# Altium PCB PCB1.pcbdoc
Units mil, origin at the board's own origin, x right, y up, seen from the top; angles counter-clockwise.
Board outline 1670 x 1320 mil, 2 copper layers (Top Layer, Bottom Layer); 23 components, 18 nets, 76 pads, 24 vias.
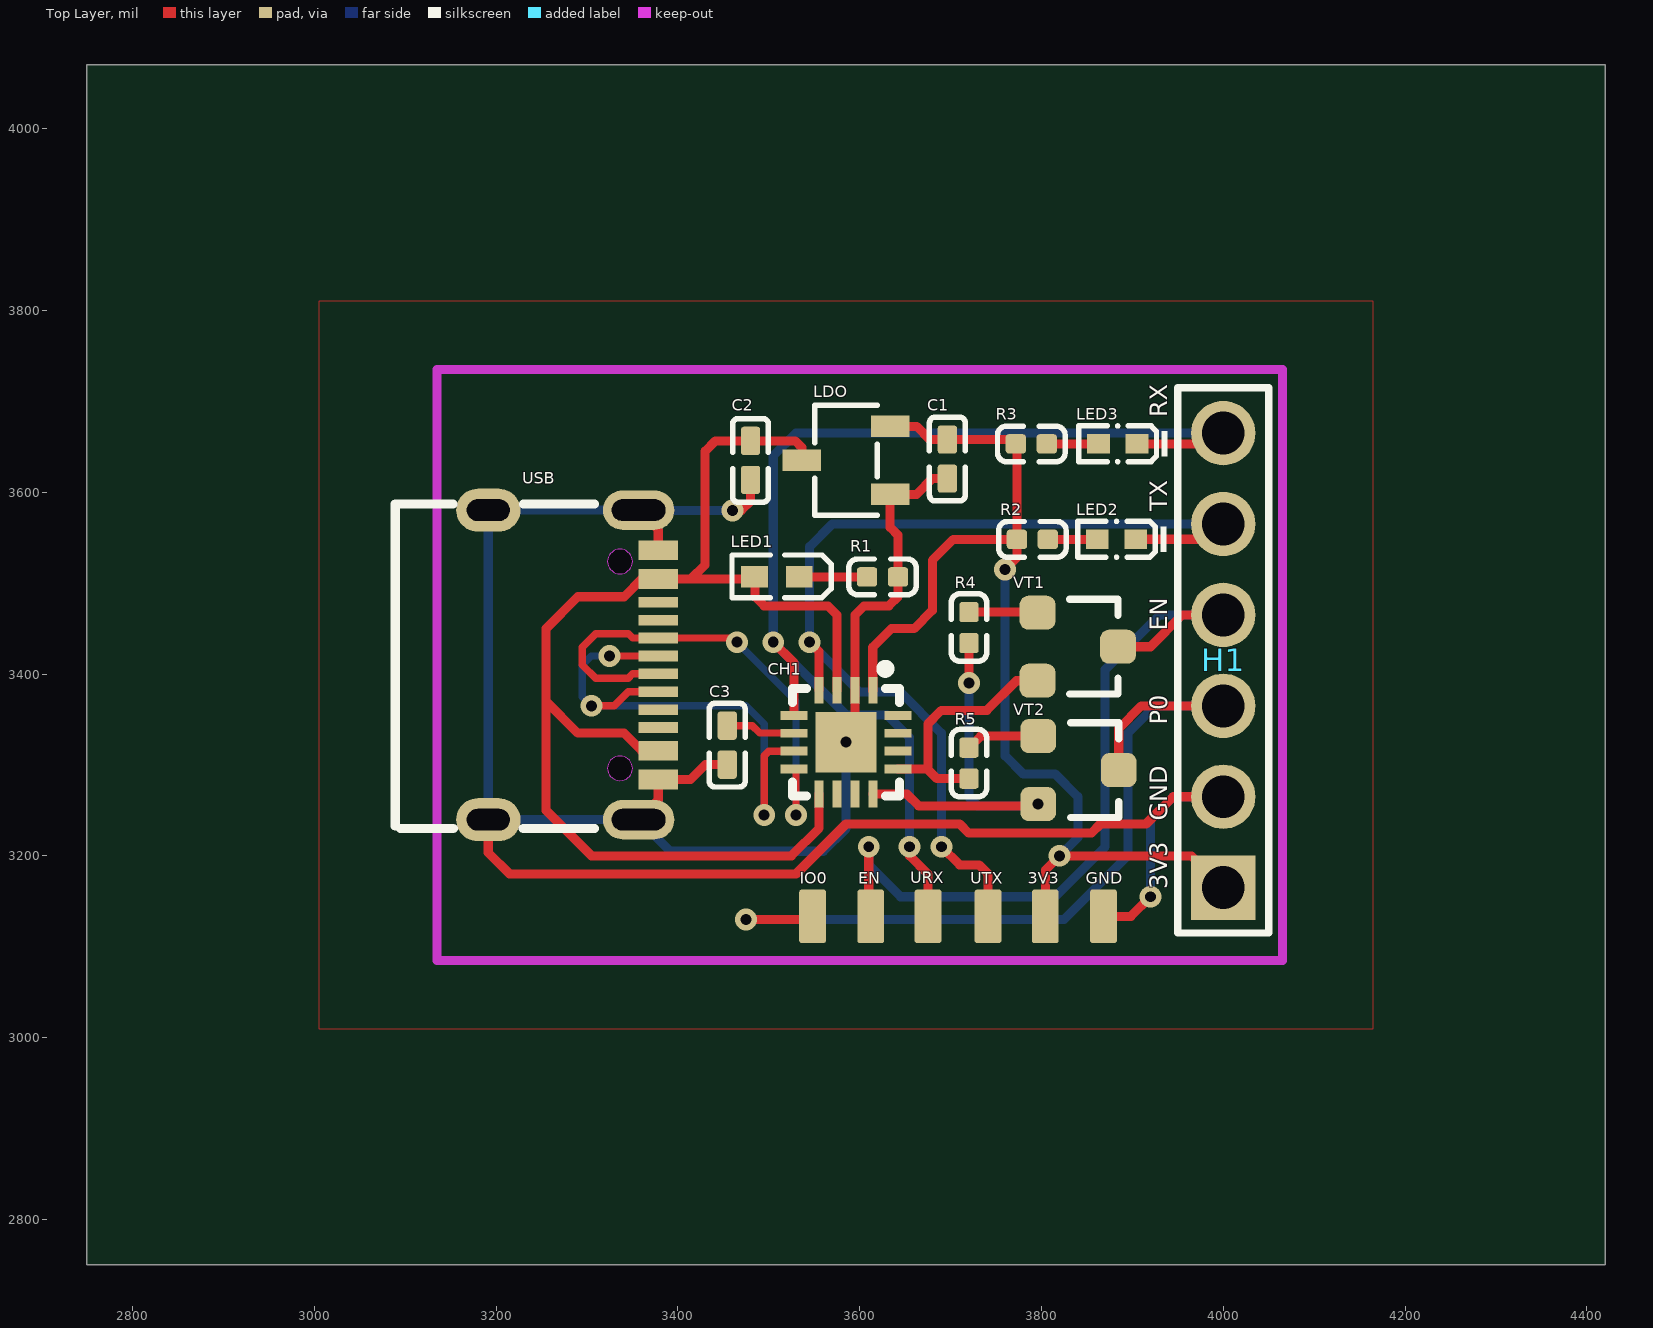
[diagram p0: Top Layer view]
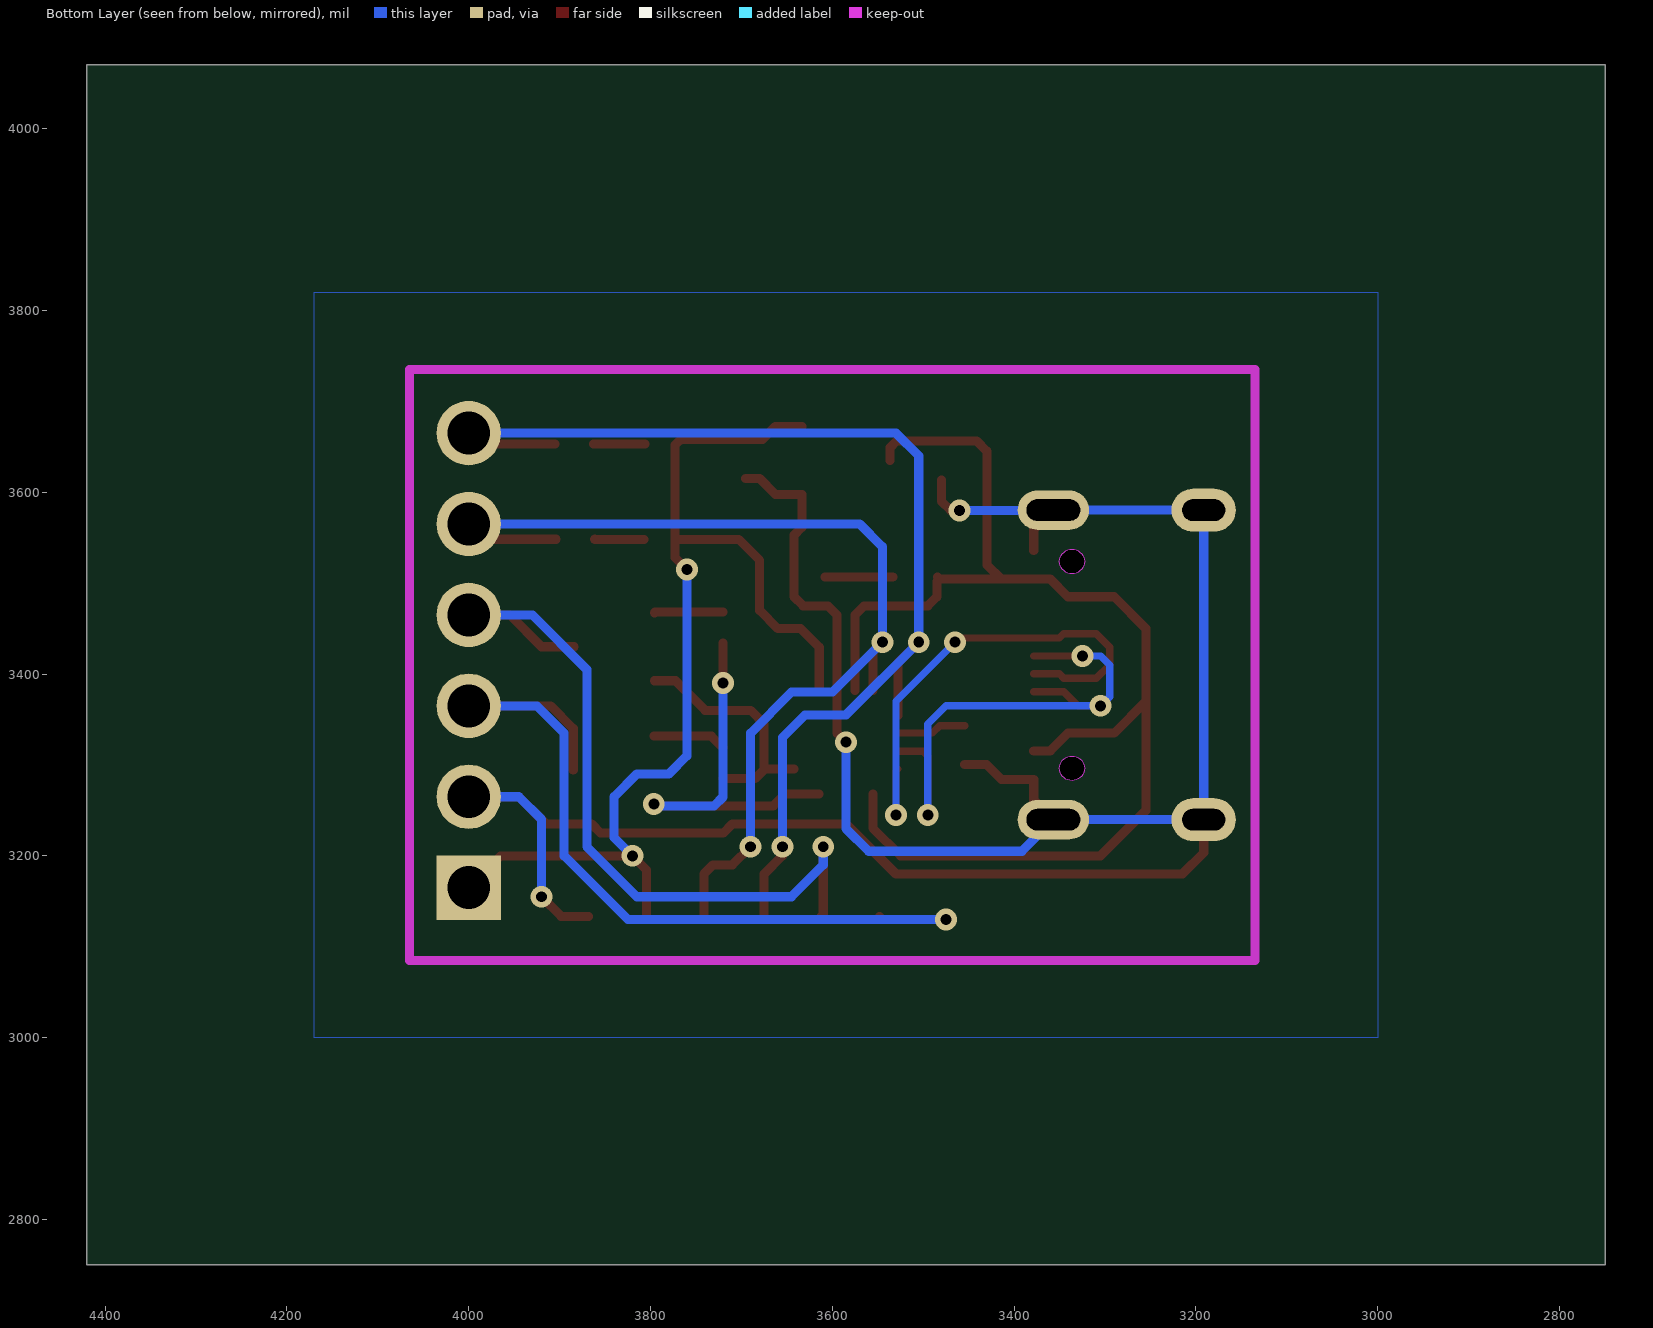
[diagram p1: Bottom Layer view, seen from below]

## Layer stack, top to bottom
Top Layer: signal copper (thickness not stored)
Dielectric: dielectric 12.6, FR-4, Dk 4.8
Bottom Layer: signal copper (thickness not stored)

## Board outline
4420,2750 2750,2750 2750,4070 4420,4070

## Components (designator, comment, footprint, x,y, rotation, side; value= is the part's Value field where it differs from the comment)
3V3 "3V3" FPCB焊脚 3804.25,3133.39 r90 top
C1 "CL05A105KP5NNNC" c0402 3696.46,3636.46 r270 top
C2 "CL05A105KP5NNNC" c0402 3480,3635 r90 top
C3 "CC0402KRX7R7BB104" c0402 3454.35,3321.73 r90 top
CH1 "CH343P" TQFN-16_L3.0-W3.0-P0.50-BL-EP1.7 3585,3325 r180 top
EN "FPCB焊脚" FPCB焊脚 3612.28,3133.39 r270 top
GND "GND" FPCB焊脚 3868.25,3133.39 r90 top
H1 "2.54-1x6P直针" HDR-TH_6P-P2.54-V-M-1 4000,3415 r90 top
IO0 "FPCB焊脚" FPCB焊脚 3548.29,3133.39 r90 top
LDO "ME6209A33M3G" SOT-23-3_L2.9-W1.6-P1.90-LS2.8-BR 3585,3635 r0 top
LED1 "XL-1005SURC" LED0402-R-RD_RED 3509.03,3506.89 r180 top
LED2 "XL-1005UGC" LED0402-RD_GREEN 3882.61,3548.24 r180 top
LED3 "XL-1005UGC" LED0402-RD_GREEN 3883.86,3653.24 r180 top
R1 "TR0402D10K0Q1025Z" R0402 3625.16,3506.89 r180 top
R2 "TR0402D10K0Q1025Z" R0402 3789.99,3548.13 r0 top
R3 "TR0402D10K0Q1025Z" R0402 3788.86,3653.13 r0 top
R4 "TR0402D10K0Q1025Z" R0402 3720.29,3451.09 r90 top
R5 "TR0402D10K0Q1025Z" R0402 3720.29,3301.92 r90 top
URX "FPCB焊脚" FPCB焊脚 3675.26,3133.39 r270 top
USB "TYPE-C 16PIN 2MD(073)" USB-C-SMD_TYPE-C-6PIN-2MD-073 3285,3410 r270 top
UTX "FPCB焊脚" FPCB焊脚 3741.27,3133.39 r90 top
VT1 "S8050" SMT_TRIODE_NPN 3840,3430 r270 top
VT2 "S8050" SMT_TRIODE_NPN 3840.71,3294.29 r270 top

## Footprints (in the part's own frame and the unit in brackets; to place one, negate y for a bottom-side part, rotate by r counter-clockwise, add the part's x,y. Pads: shape width x height; smd on the part's side, far side on the other; paste and mask are expansions set on the pad)
c0402 [mm]
  rrect30% 0.79x0.54 smd: 1(-0.545,0) 2(0.545,0)
  silkscreen extent -1.17,-0.5 1.17,0.5
FPCB焊脚 [mm]
  rrect20% 1.5x0.75 smd: 1(0,0)
HDR-TH_6P-P2.54-V-M-1 [mm]
  rect 1.8x1.8 hole 1.2: 1(-6.35,0)
  round 1.8 hole 1.2: 2(-3.81,0) 3(-1.27,0) 4(1.27,0) 5(3.81,0) 6(6.35,0)
  silkscreen extent -7.62,-1.27 7.62,1.27
LED0402-R-RD_RED [mm]
  rect 0.75x0.6 smd: 1(0.623,0) 2(-0.623,0)
  silkscreen extent -1.51,-0.61 1.26,0.58
LED0402-RD_GREEN [mm]
  rect 0.636x0.54 smd: 1(-0.538,0) 2(0.538,0)
  silkscreen extent -1.39,-0.54 1.09,0.54
R0402 [mm]
  rrect30% 0.566x0.54 smd: 1(-0.433,0) 2(0.433,0)
  silkscreen extent -0.94,-0.5 0.94,0.5
SMT_TRIODE_NPN [mm]
  rrect50% 0.95x1 smd: 1(-0.95,-1.125) 2(0.95,-1.125) 3(0,1.125)
  silkscreen extent -1.33,-0.22 1.32,1.13
SOT-23-3_L2.9-W1.6-P1.90-LS2.8-BR [mm]
  rect 1.07x0.6 smd: 1(1.235,-0.95) 2(1.235,0.95) 3(-1.235,0)
  silkscreen extent -0.88,-1.54 0.88,1.54
TQFN-16_L3.0-W3.0-P0.50-BL-EP1.7 [mm]
  rect 0.25x0.75 smd: 1(-0.748,-1.45) 2(-0.249,-1.45) 3(0.252,-1.45) 4(0.751,-1.45) 9(0.75,1.45) 10(0.25,1.45) 11(-0.25,1.45) 12(-0.749,1.45)
  rect 0.75x0.25 smd: 5(1.45,-0.75) 6(1.45,-0.25) 7(1.45,0.25) 8(1.45,0.75) 13(-1.45,0.75) 14(-1.45,0.25) 15(-1.45,-0.25) 16(-1.45,-0.75)
  rect 1.7x1.7 smd: 17(0,0)
  silkscreen extent -1.5,-2.17 1.5,1.5
USB-C-SMD_TYPE-C-6PIN-2MD-073 [mm]
  rect 0.55x1.1 smd: 1(-3.2,2.375) 2(-2.4,2.375) 11(2.4,2.375) 12(3.2,2.375)
  rect 0.3x1.1 smd: 3(-1.75,2.375) 4(-1.25,2.375) 5(-0.75,2.375) 6(-0.25,2.375) 7(0.25,2.375) 8(0.75,2.375) 9(1.25,2.375) 10(1.75,2.375)
  oval 1.1x2 hole 0.6 slot 1.5 at 90 deg: 13(-4.325,1.825) 14(4.325,1.825)
  oval 1.2x1.8 hole 0.6 slot 1.2 at 90 deg: 13(-4.325,-2.375) 14(4.325,-2.375)
  Multi-Layer board cut-out: -2.89,1.655 -3.062,1.606 -3.187,1.478 -3.233,1.305 -3.188,1.132 -3.062,1.004 -2.89,0.955 -2.89,0.955 -2.718,1.004 -2.592,1.132 -2.547,1.305 -2.592,1.478 -2.718,1.606 -2.89,1.655
  Multi-Layer board cut-out: 2.89,1.655 2.718,1.606 2.593,1.478 2.547,1.305 2.592,1.132 2.718,1.004 2.89,0.955 2.89,0.955 3.062,1.004 3.188,1.132 3.233,1.305 3.188,1.478 3.062,1.606 2.89,1.655
  Multi-Layer keep-out region: -2.89,1.655 -3.062,1.606 -3.187,1.478 -3.233,1.305 -3.188,1.132 -3.062,1.004 -2.89,0.955 -2.89,0.955 -2.718,1.004 -2.592,1.132 -2.547,1.305 -2.592,1.478 -2.718,1.606 -2.89,1.655
  Multi-Layer keep-out region: 2.89,1.655 2.718,1.606 2.593,1.478 2.547,1.305 2.592,1.132 2.718,1.004 2.89,0.955 2.89,0.955 3.062,1.004 3.188,1.132 3.233,1.305 3.188,1.478 3.062,1.606 2.89,1.655
  silkscreen extent -4.5,-4.97 4.57,0.6

## Via types
v1: diameter 24.02, hole 12.01, Top Layer to Bottom Layer, 24 vias

## Nets (pads, with @x,y where several pads share a name; then routed paths per layer and width w, separated by ;. In a path a pad name is that pad's centre, name@x,y a point inside that pad or via, vN(x,y) a via of type N, cw(c..) or ccw(c..) an arc to the next point about the centre after c; other vN are vias at no path point)
3V3: 3V3.1 C1.1 CH1.1 H1.1 LDO.2 R2.1 R3.1 | length 1221.9
  Top Layer w10: CH1.1 3614.47,3429.47 3635,3450 3660,3450 3680,3470 3680,3525 3703.13,3548.13 R2.1 ; LDO.2 3662.6,3672.4 3677.02,3657.98 3696.46,3657.98 3766.97,3657.98 R3.1 3772.95,3652.01 R2.1 ; v1(3760,3515) 3772.95,3527.95 R2.1 ; 3V3.1 3804.25,3184.25 v1(3820,3200) 3965,3200 H1.1
  Bottom Layer w10: v1(3760,3515) 3760,3310 3780,3290 3815,3290 3840,3265 3840,3220 v1(3820,3200)
$1N1465: R5.2 VT2.1 | length 81.4
  Top Layer w10: R5.2 3733.02,3331.69 VT2.1
$1N1471: R4.2 VT1.1 | length 75.7
  Top Layer w10: R4.2 3794.98,3468.13 VT1.1
$1N1804: LED1.2 R1.2 | length 74.6
  Top Layer w10: LED1.2 R1.2
$1N2102: C3.2 CH1.6 | length 77
  Top Layer w8: C3.2 3481.81,3343.19 3490,3335 3527.76,3335 CH1.6
$1N3108: LED2.2 R2.2 | length 54.4
  Top Layer w10: R2.2 3861.31,3548.13 LED2.2
$1N3156: LED3.2 R3.2 | length 56.8
  Top Layer w10: R3.2 3862.56,3653.13 LED3.2
CP_RX: CH1.5 H1.6 LED3.1 URX.1 | length 1298.6
  Top Layer w10: v1(3505,3435) 3527.91,3412.09 CH1.5 ; v1(3655,3210) 3655,3200 3675,3180 3675,3133.65 URX.1 ; LED3.1 3988.24,3653.24 H1.6
  Bottom Layer w10: v1(3655,3210) 3655,3330 3630,3355 3585,3355 v1(3505,3435) 3505,3640 3530,3665 H1.6
  other v1: 3505,3435 3505,3435
CP_TX: CH1.4 H1.5 LED2.1 UTX.1 | length 1152.5
  Top Layer w10: v1(3545,3435) 3555.41,3424.59 CH1.4 ; v1(3690,3210) 3710,3190 3731.27,3190 3741.27,3180 UTX.1 ; LED2.1 3983.24,3548.24 H1.5
  Bottom Layer w10: v1(3690,3210) 3690,3335 3645,3380 3600,3380 v1(3545,3435) 3545,3540 3570,3565 H1.5
  other v1: 3690,3210
DTR: CH1.12 R4.1 VT2.2 | length 436.1
  Top Layer w10: CH1.12 3652.09,3267.91 3665,3255 3794.53,3255 v1(3796.42,3256.89) ; v1(3720.29,3390) R4.1
  Bottom Layer w10: v1(3720.29,3390) 3720.29,3264.71 3730,3255 v1@3795,3255
EN: EN.1 H1.4 VT1.3 | length 874.9
  Top Layer w10: v1(3610,3210) 3610,3135.66 EN.1 ; VT1.3 3920,3430 3955,3465 H1.4
  Bottom Layer w10: v1(3610,3210) 3610,3190 3645,3155 3815,3155 3870,3210 3870,3405 3930,3465 H1.4
GND: C1.2 C2.1 C3.1 CH1.2 CH1.17 GND.1 H1.2 LDO.1 R1.1 USB.1 USB.12 USB.13 USB.14 | length 2877.9
  Top Layer w10: USB.14@3191.49,3239.72 3191.49,3203.51 3215,3180 3530,3180 3585,3235 3710,3235 3720,3225 3855,3225 3865,3235 3915,3235 3945,3265 v1(4000,3265) ; v1(3356.86,3239.72) 3378.51,3261.38 USB.12 3414.01,3284.01 3430.27,3300.27 C3.1 ; USB.13@3356.86,3580.28 3378.51,3558.62 USB.1 ; v1(3460,3580) 3470,3580 3480,3590 C2.1 ; v1(3585,3325) 3594.78,3334.8 CH1.2 3594.78,3464.78 3605,3475 3632.2,3475 3642.2,3485 R1.1 3642.2,3552.8 3633.62,3561.38 LDO.1 3662.6,3597.6 3680.06,3615.06 C1.2@3695.32,3615.06 ; GND.1 3898.39,3133.39 v1(3920,3155)
  Bottom Layer w10: v1(3460,3580) 3357.13,3580 3356.86,3580.28 3191.49,3580.28 3191.49,3239.72 v1(3356.86,3239.72) 3391.58,3205 3560,3205 3585,3230 v1(3585,3325) ; v1(3920,3155) 3920,3240 3945,3265 v1(4000,3265)
GPIO0: H1.3 IO0.1 VT2.3 | length 947.2
  Top Layer w10: v1(3475,3130) 3544.9,3130 IO0.1 ; VT2.3 3885,3340 3910,3365 H1.3
  Bottom Layer w10: v1(3475,3130) 3825,3130 3895,3200 3895,3335 3925,3365 H1.3
RTS: CH1.13 R5.1 VT1.2 | length 272.7
  Top Layer w10: CH1.13 3674.53,3295.47 ; R5.1 3685.12,3284.88 3674.53,3295.47 ; VT1.2 3772.6,3392.6 3740,3360 3690,3360 3675,3345 3675,3295.94 3674.53,3295.47
USB-PWR-DN: CH1.8 USB.5 USB.7 | length 559.3
  Top Layer w8: USB.7 3350.16,3400.16 3345.38,3395.38 3309.62,3395.38 3295,3410 3295,3429.53 3309.77,3444.3 3345.7,3444.3 3350.47,3439.53 USB.5 3460.47,3439.53 v1(3465,3435) ; CH1.8 3530,3293.39 v1(3530,3245)
  Bottom Layer w8: v1(3465,3435) 3530,3370 v1(3530,3245)
USB-PWR-DP: CH1.7 USB.6 USB.8 | length 615
  Top Layer w8: v1(3305,3365) 3330,3365 3345.47,3380.47 USB.8 ; v1(3325,3419.84) USB.6 ; v1(3495,3245) 3495,3310 3500.15,3315.15 CH1.7
  Bottom Layer w8: v1(3325,3419.84) 3304.84,3419.84 3295,3410 3295,3375 v1(3305,3365) 3475,3365 3495,3345 v1(3495,3245)
  other v1: 3325,3419.84
VDD_5V: C2.2 CH1.3 CH1.9 LDO.3 LED1.1 USB.2 USB.11 | length 1447.6
  Top Layer w10: USB.11 3360.33,3315.51 3340.84,3335 3290,3335 3255,3370 ; LED1.1 LED1.1@3482.1,3504.49 ; LDO.3 3536.38,3649.14 3529.06,3656.46 C2.2 3441.46,3656.46 3430,3645 3430,3520 3414.49,3504.49 ; CH1.9 3555.47,3230.47 3525,3200 3305,3200 3255,3250 3255,3370 ; CH1.3 3575,3382.18 3575,3465 3565,3475 3495,3475 3485,3485 3485,3501.59 LED1.1@3482.1,3504.49 ; 3255,3370 3255,3450 3290,3485 3340.85,3485 3360.33,3504.49 USB.2 3414.49,3504.49 ; 3414.49,3504.49 LED1.1@3482.1,3504.49
"": CH1.10 CH1.11 CH1.14 CH1.15 CH1.16 USB.3 USB.4 USB.9 USB.10

## Polygon pours and split planes (outlines as drawn)
GND on Top Layer (solid, remove dead copper, pour order 0): 3005,3010 4165,3010 4165,3810 3005,3810
GND on Bottom Layer (solid, remove dead copper, pour order 1): 3000,3000 4170,3000 4170,3820 3000,3820

## Keep-outs
Board Outline Layer:
  lines w10 net "": 3135,3085 4065,3085 4065,3735 3135,3735 3135,3085

## Silkscreen, mask and mechanical layers (free items; w line width, h text height)
Top Silkscreen Layer:
  text "RX" at 3938.34,3682.34 h19.47 r90
  text "TX" at 3938.34,3579.19 h19.47 r90
  text "EN" at 3938.34,3447.34 h19.47 r90
  text "P0" at 3938.34,3344.19 h19.47 r90
  text "GND" at 3938.34,3238.34 h19.47 r90
  text "3V3" at 3938.34,3163.34 h19.47 r90